# Altium PCB Waspmoteprint_Diff_zu_I2C.PcbDoc
Units mm, origin at the board's own origin, x right, y up, seen from the top; angles counter-clockwise.
Board outline 41.91 x 35.56 mm, 2 copper layers (Top Layer, Bottom Layer), stack 1.586 mm thick; 26 components, 27 nets, 110 pads, 21 vias.
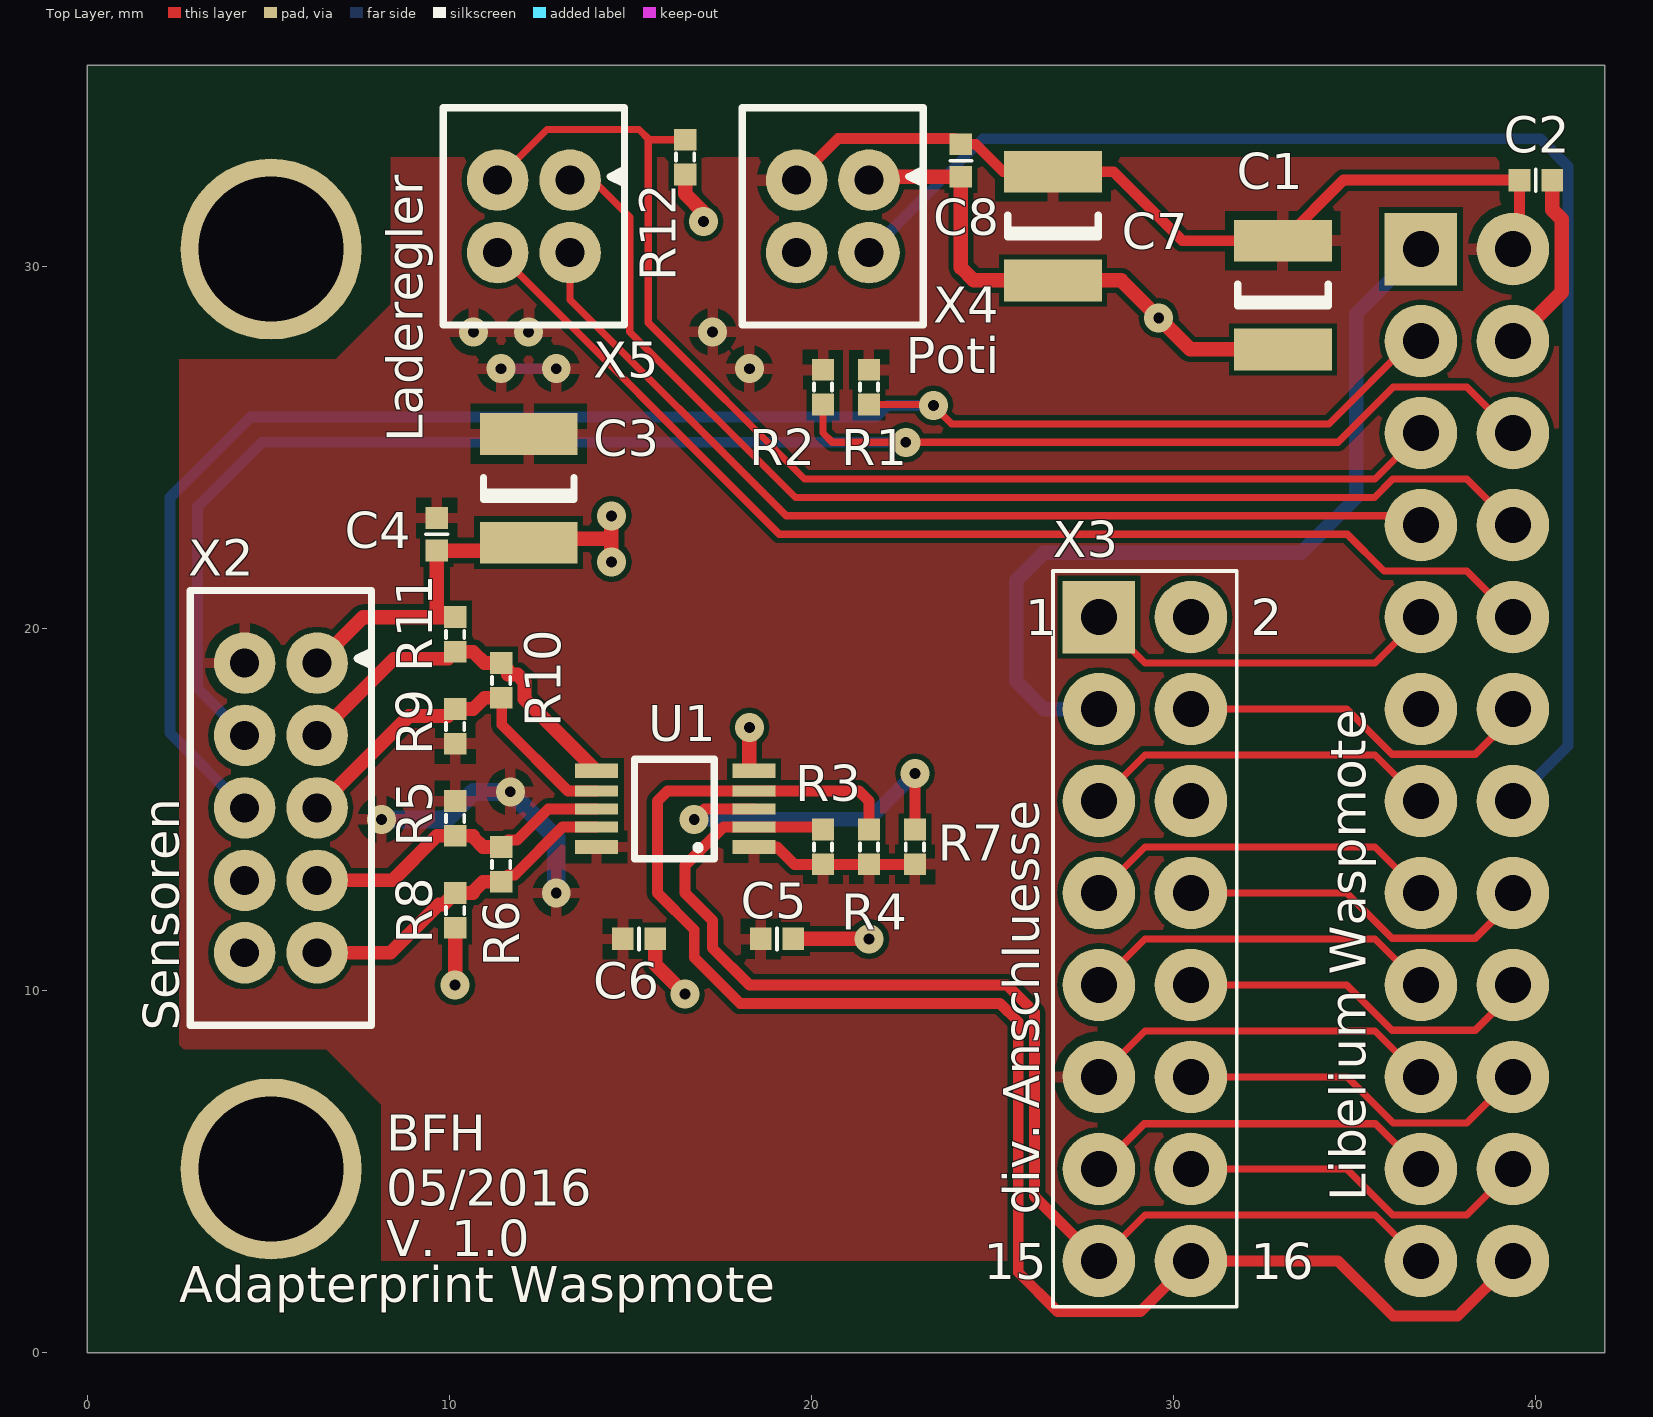
[diagram p0: Top Layer view]
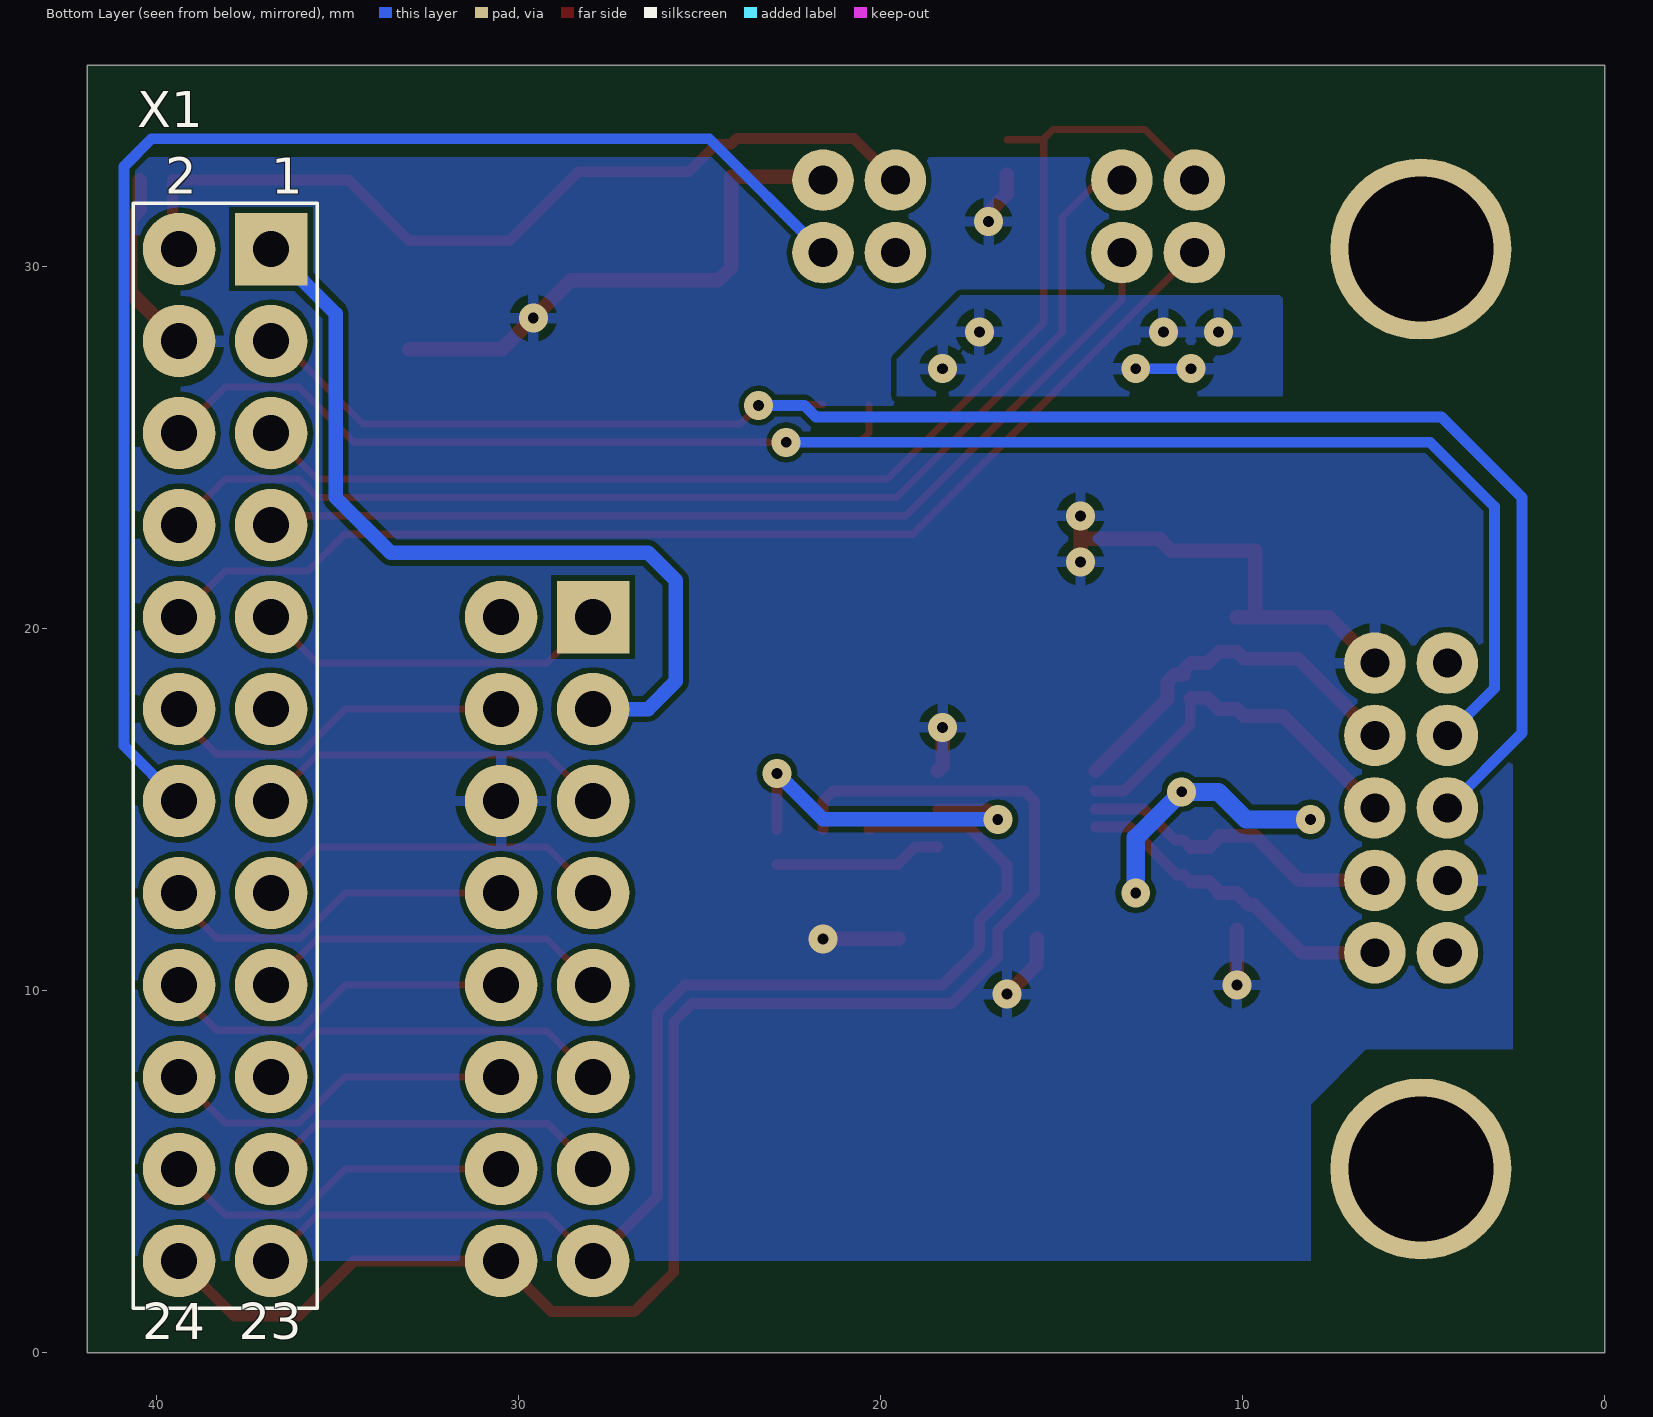
[diagram p1: Bottom Layer view, seen from below]

## Layer stack, top to bottom
Top Solder: solder mask 0.0102, Solder Resist, Dk 3.5
Top Layer: signal copper 0.018
Dielectric1: core 1.55, FR-4, Dk 4.8
Bottom Layer: signal copper 0.018
Bottom Solder: solder mask 0.0102, Solder Resist, Dk 3.5

## Board outline
0,0 0,35.56 41.91,35.56 41.91,0

## Design rules (kind name [scope] priority, off if disabled: settings)
Clearance Clearance-xPP-xTP-xTT [All] p1: gap=0.15
ComponentClearance [All] p1: gap=0.25 collisioncheckmode=3 verticalgap=0.25 showdistances=FALSE
DiffPairsRouting [All] p1: maxlimit=0.25 minlimit=0.25 mostfreqgap=0.25 toplayer_minwidth=0.381 toplayer_maxwidth=0.381 toplayer_prefwidth=0.381 bottomlayer_minwidth=0.381 bottomlayer_maxwidth=0.381 bottomlayer_prefwidth=0.381 maxuncoupledlength=12.5
Height [All] p1: minheight=0 maxheight=25 prefheight=12.5
HoleSize HoleSize-PTH [All] p1: absolutevalues=TRUE maxlimit=5 minlimit=0.25 maxpercent=80.000 minpercent=20.000
HoleToHoleClearance [All] p1: gap=0.15 allowstackedmicrovias=TRUE
MinimumAnnularRing "Minimum IAR  >0.45mm" [((ObjectKind = 'Pad') OR (ObjectKind = 'Via')) And (Layer = 'MultiLayer') And (HoleDiameter > AsMM(0.45))] p1: minimumring=0.25 // minimum inner annular ring for pads > 0.45mm finished hole size
MinimumAnnularRing "Minimum IAR <=0.45mm" [((ObjectKind = 'Pad') OR (ObjectKind = 'Via')) And (Layer = 'MultiLayer') And (HoleDiameter <= AsMM(0.45))] p2: minimumring=0.225 // minimum inner annular ring for pads <= 0.45mm finished hole size
MinimumSolderMaskSliver [All] p1: minsoldermaskwidth=0.1
PlaneClearance PlaneClearance-IPI [All] p1: clearance=0.4
PlaneConnect [All] p1: planeconnectstyle=Relief reliefexpansion=0.4 reliefentries=4 reliefconductorwidth=0.3 reliefairgap=0.2
PolygonConnect PolygonConnect-xTW [All] p1: connectstyle=Relief reliefconductorwidth=0.3 reliefentries=4 polygonreliefangle="90 Angle" airgapwidth=0.254
RoomDefinition Waspmoteprint_Diff_zu_I2C [InComponentClass('Waspmoteprint_Diff_zu_I2C')] p1: confinementstyle=ConfineIn formatcopy=TRUE lockcomponents=FALSE outline -5.08,-0.79 94.92,-0.79 94.92,98.73 -5.08,98.73
RoutingCorners [All] p1: cornerstyle=45-Degree minsetback=2.5 maxsetback=2.5
RoutingVias "RoutingVias > 0.45mm" [(ObjectKind = 'Via') And (HoleDiameter > AsMM(0.45))] p1: holewidth=0.5 width=1 viastyle="Through Hole" minholewidth=0.45 minwidth=0.95 maxholewidth=0.9 maxwidth=1.4 // finishet hole size > 0.45mm
RoutingVias "RoutingVias <= 0.45mm" [(ObjectKind = 'Via') And (HoleDiameter <= AsMM(0.45))] p2: holewidth=0.3 width=0.8 viastyle="Through Hole" minholewidth=0.25 minwidth=0.7 maxholewidth=0.5 maxwidth=1 // finishet hole size <= 0.45mm
SilkToSilkClearance [All] p1: silktosilkclearance=0.2
SilkToSolderMaskClearance SilkscreenOverComponentPads [IsPad] p1: minsilkscreentomaskgap=0.2 clearancetoexposedcopper=TRUE
SolderMaskExpansion [All] p1: expansion=0.1
UnpouredPolygon [All] p1: allowunpoured=FALSE
Width Width-xTW [All] p1: maxlimit=1.5 minlimit=0.15 preferedwidth=0.3
18 further rules are at their usual default settings.

## Classes and differential pairs
differential pair DSCL: +DSCL_P -DSCL_N
differential pair DSDA: +DSDA_P -DSDA_N

## Components (designator, comment, footprint, x,y, rotation, side; value= is the part's Value field where it differs from the comment)
C1 "100uF" CAPC3225[1210]X120 33.02,29.21 r90 top
C2 "100nF" CAPC1005[0402]X50 40.005,32.385 r180 top
C3 "100uF" CAPC3225[1210]X120 12.192,23.876 r90 top
C4 "100nF" CAPC1005[0402]X50 9.652,22.606 r90 top
C5 "100nF" CAPC1005[0402]X50 19.05,11.43 r180 top
C6 "100nF" CAPC1005[0402]X50 15.24,11.43 r180 top
C7 "100uF" CAPC3225[1210]X120 26.67,31.115 r90 top
C8 "100nF" CAPC1005[0402]X50 24.13,32.925 r90 top
R1 "100k" RESC1005[0402]X35 21.59,26.67 r90 top
R2 "100k" RESC1005[0402]X35 20.32,26.67 r90 top
R3 "4k7" RESC1005[0402]X35 20.32,13.97 r270 top
R4 "4k7" RESC1005[0402]X35 21.59,13.97 r270 top
R5 "390" RESC1005[0402]X35 10.16,14.76 r90 top
R6 "120" RESC1005[0402]X35 11.43,13.49 r90 top
R7 "100k" RESC1005[0402]X35 22.86,13.97 r90 top
R8 "390" RESC1005[0402]X35 10.16,12.22 r90 top
R9 "390" RESC1005[0402]X35 10.16,17.3 r270 top
R10 "120" RESC1005[0402]X35 11.43,18.57 r270 top
R11 "390" RESC1005[0402]X35 10.16,19.84 r270 top
R12 "100k" RESC1005[0402]X35 16.51,33.02 r90 top
U1 "PCA9615" TSSOP10 18.415,13.97 r90 top
X1 "HEADER_12X2" HDR2X12_V_M 36.83,30.48 r180 bottom
X2 "Header_10Pol" Header_2mm_10Pol 6.35,19.05 r270 top
X3 "HEADER_8X2" HDR2X8_V_M 27.94,20.32 r0 top
X4 "Header_4Pol" Header_2mm_4Pol 21.59,32.385 r270 top
X5 "Header_4Pol" Header_2mm_4Pol 13.335,32.385 r270 top

## Footprints (in the part's own frame and the unit in brackets; to place one, negate y for a bottom-side part, rotate by r counter-clockwise, add the part's x,y. Pads: shape width x height; smd on the part's side, far side on the other; paste and mask are expansions set on the pad)
CAPC1005[0402]X50 [mm] "Chip Capacitor; 1.0x0.5mm"
  rect 0.6x0.62 smd: 1(-0.45,0) 2(0.45,0)
  silkscreen extent 0,-0.3 0,0.3, body extent -0.5,-0.25 0.5,0.25, height 0.5
CAPC3225[1210]X120 [mm] "Chip Capacitor; 3.2x2.5 mm"
  rect 1.15x2.7 smd: 1(-1.5,0) 2(1.5,0)
  silkscreen extent -0.3,-1.25 0.3,1.25, body extent -1.6,-1.25 1.6,1.25, height 1.2
HDR2X8_V_M [mm] "Connector; Header; 8x2 Position male"
  rect 2x2 hole 1: 1(0,0)
  round 2 hole 1: 2(2.54,0) 3(0,-2.54) 4(2.54,-2.54) 5(0,-5.08) 6(2.54,-5.08) 7(0,-7.62) 8(2.54,-7.62) 9(0,-10.16) 10(2.54,-10.16) 11(0,-12.7) 12(2.54,-12.7) 13(0,-15.24) 14(2.54,-15.24) 15(0,-17.78) 16(2.54,-17.78)
  silkscreen extent -1.27,-19.05 3.81,1.27, body extent -1.28,-19.07 3.82,1.27, height 8.3
HDR2X12_V_M [mm] "Connector; Header; 6x2 Position male"
  rect 2x2 hole 1: 1(0,0)
  round 2 hole 1: 2(-2.54,0) 3(0,-2.54) 4(-2.54,-2.54) 5(0,-5.08) 6(-2.54,-5.08) 7(0,-7.62) 8(-2.54,-7.62) 9(0,-10.16) 10(-2.54,-10.16) 11(0,-12.7) 12(-2.54,-12.7) 13(0,-15.24) 14(-2.54,-15.24) 15(0,-17.78) 16(-2.54,-17.78) 17(0,-20.32) 18(-2.54,-20.32) 19(0,-22.86) 20(-2.54,-22.86) 21(0,-25.4) 22(-2.54,-25.4) 23(0,-27.94) 24(-2.54,-27.94)
  silkscreen extent -3.81,-29.25 1.27,1.27, body extent -3.82,-29.24 1.28,1.27, height 8.3
Header_2mm_4Pol [mm]
  round 1.7 hole 0.8: 1(0,0) 2(0,-2) 3(2,0) 4(2,-2)
  silkscreen extent -2,-3.5 4,1.5
Header_2mm_10Pol [mm]
  round 1.7 hole 0.8: 1(0,0) 2(0,-2) 3(2,0) 4(2,-2) 5(4,0) 6(4,-2) 7(6,0) 8(6,-2) 9(8,0) 10(8,-2)
  silkscreen extent -2,-3.5 10,1.5
RESC1005[0402]X35 [mm] "Chip Resistor; 1x0.5mm"
  rect 0.6x0.62 smd: 1(-0.48,0) 2(0.48,0)
  silkscreen extent -0.1,-0.25 0.1,0.25, body extent -0.5,-0.25 0.5,0.25, height 0.35
TSSOP10 [mm]
  rect 0.4x1.2 smd: 1(0,0) 5(2.1,0) 6(2.1,4.35) 10(0,4.35)
  rect 0.3x1.2 smd: 2(0.55,0) 3(1.05,0) 4(1.55,0) 7(1.55,4.35) 8(1.05,4.35) 9(0.55,4.35)
  silkscreen extent -0.33,1.1 2.42,3.3

## Part data
C1 C2 C3 C4 C5 C6 C7 C8: library part C, "Capacitor"
R1 R2 R3 R4 R5 R6 R7 R8 R9 R10 R11 R12: library part R, "Resistor"
U1: "differential I2C-bus buffer"
X1: "Header, 12-Pin, Dual row"
X2: library part Header_Hirose_10, "Header Hirose 10 Pol"
X3: "Header, 16-Pin, Dual row"
X4 X5: library part Header_Hirose_4, "Header Hirose 4 Pol"

## Free pads (board coordinates)
  round 5 hole 4: 0(5.08,5.08) 0(5.08,30.48)

## Via types
v1: diameter 0.8, hole 0.3, Top Layer to Bottom Layer, 21 vias

## Nets (pads, with @x,y where several pads share a name; then routed paths per layer and width w, separated by ;. In a path a pad name is that pad's centre, name@x,y a point inside that pad or via, vN(x,y) a via of type N, cw(c..) or ccw(c..) an arc to the next point about the centre after c; other vN are vias at no path point)
3V3: C1.2 C2.2 C3.2 C4.2 C5.2 C6.2 C7.2 C8.2 R1.2 R2.2 R3.2 R4.2 R5.2 R7.1 R9.2 U1.1 U1.10 X1.2 X1.19 X2.2 X3.11 X4.2 | length 48
  Top Layer w0.2: X3.11 29.21,8.89 35.56,8.89 X1.19
  Top Layer w0.3: U1.1 19.05,13.97 19.53,13.49 R3.2 R4.2 R7.1 ; X4.2 20.74,33.535 23.97,33.535 C8.2 24.537,33.375 25.297,32.615 C7.2 28.345,32.615 30.25,30.71 C1.2 34.695,32.385 C2.2 39.555,30.665 X1.2
  Bottom Layer w0.3: v1@10.668,27.94 v1(10.668,28.194) ; v1(11.43,27.178) v1(12.954,27.178) v1@12.827,27.305
  Bottom Layer w0.5: v1(8.128,14.732) 9.906,14.732 10.668,15.494 v1(11.684,15.494) 12.954,14.224 v1(12.954,12.7)
  other v1: 18.288,27.178 12.192,28.194 17.272,28.194
5V: X1.22 X3.14 | length 9.9
  Top Layer w0.2: X3.14 34.785,5.08 36.055,3.81 38.1,3.81 X1.22
ANALOG: X1.1 X3.3 | length 23.3
  Bottom Layer w0.4: X3.3 26.416,17.78 25.654,18.542 25.654,21.336 26.416,22.098 33.528,22.098 35.052,23.622 35.052,28.702 X1.1
ANALOG1: X1.20 X3.12 | length 9.9
  Top Layer w0.2: X3.12 34.798,7.62 36.068,6.35 38.1,6.35 X1.20
ANALOG2: X1.17 X3.9 | length 9.9
  Top Layer w0.2: X3.9 29.21,11.43 35.56,11.43 X1.17
ANALOG3: X1.18 X3.10 | length 10.1
  Top Layer w0.2: X3.10 34.785,10.16 36.035,8.91 38.334,8.91 39.37,9.946 X1.18
ANALOG4: X1.15 X3.7 | length 9.9
  Top Layer w0.2: X3.7 29.21,13.97 35.56,13.97 X1.15
ANALOG5: X1.16 X3.8 | length 10.1
  Top Layer w0.2: X3.8 34.785,12.7 36.035,11.45 38.334,11.45 39.37,12.486 X1.16
ANALOG6: X1.13 X3.5 | length 9.9
  Top Layer w0.2: X3.5 29.21,16.51 35.56,16.51 X1.13
ANALOG7: X1.14 X4.3 | length 39.1
  Bottom Layer w0.3: X4.3 24.733,33.528 40.132,33.528 40.894,32.766 40.894,16.764 X1.14
DIGITAL1: X1.12 X3.4 | length 10.1
  Top Layer w0.2: X3.4 34.785,17.78 36.035,16.53 38.334,16.53 39.37,17.566 X1.12
DIGITAL2: X1.9 X3.1 | length 9.9
  Top Layer w0.2: X3.1 29.21,19.05 35.56,19.05 X1.9
DIGITAL3: X1.10 X5.4 | length 32.2
  Top Layer w0.2: X5.4 19.114,22.606 34.798,22.606 35.814,21.59 38.1,21.59 X1.10
DIGITAL4: X1.7 X5.3 | length 27.4
  Top Layer w0.2: X5.3 13.335,29.083 19.304,23.114 36.576,23.114 X1.7
DIGITAL5: X1.8 X5.1 | length 32.3
  Top Layer w0.2: X5.1 13.969,32.385 14.986,31.368 14.986,28.194 19.558,23.622 35.547,23.622 36.055,24.13 38.1,24.13 X1.8
DIGITAL6: R12.2 X1.5 X5.2 | length 34.6
  Top Layer w0.2: X5.2@11.319,32.401 12.7,33.782 15.24,33.782 15.522,33.5 R12.2 ; 15.494,33.528 15.494,28.448 19.812,24.13 35.56,24.13 X1.5
DSCL_N: R10.1 R11.2 U1.6 X2.3 | length 10.4
  Top Layer w0.381: X2.3 8.47,19.17 9.97,19.17 R11.2 10.66,19.36 10.971,19.05 R10.1 11.62,18.86 11.62,18.731 11.881,18.731 12.08,18.531 12.08,18.055 U1.6
DSCL_P: R9.1 R10.2 U1.7 X2.5 | length 10.5
  Top Layer w0.3: R10.2@11.449,18.071 11.449,17.345 13.275,15.52 U1.7
  Top Layer w0.381: X2.5 8.889,17.59 9.97,17.59 R9.1 10.66,17.78 10.971,18.09 R10.2 R10.2@11.449,18.071
DSDA_N: R6.1 R8.2 U1.9 X2.9 | length 9.2
  Top Layer w0.3: R6.1 11.62,13.201 11.807,13.201 13.126,14.52 U1.9
  Top Layer w0.381: X2.9 8.378,11.05 9.709,12.381 9.841,12.381 R8.2 10.66,12.7 10.66,12.741 10.93,13.01 R6.1
DSDA_P: R5.1 R6.2 U1.8 X2.7 | length 8.8
  Top Layer w0.3: R6.2 11.62,14.16 11.874,14.16 12.734,15.02 U1.8
  Top Layer w0.381: X2.7 8.429,13.05 9.66,14.28 R5.1 10.66,14.28 10.66,14.239 10.93,13.97 R6.2
GND: C1.1 C2.1 C3.1 C4.1 C5.1 C6.1 C7.1 C8.1 R8.1 R11.1 R12.1 U1.5 X1.4 X2.1 X2.8 X3.6 X4.1 | length 40.7
  Top Layer w0.4: X2.1 7.62,20.32 9.652,20.32 ; v1(10.16,10.16) R8.1@10.16,11.684 ; R11.1 9.652,20.32 ; v1(14.478,21.844) 14.478,22.479 ; v1(14.478,23.114) 14.478,22.479 ; C6.1 15.69,10.726 v1(16.51,9.906) ; R12.1 16.51,32.004 17.018,31.496 v1(17.018,31.242) ; v1(18.288,17.272) 18.288,16.197 U1.5 ; C5.1 v1(21.59,11.43) ; X4.1 21.68,32.475 C8.1 24.13,29.972 24.487,29.615 C7.1 28.551,29.615 30.456,27.71 C1.1 ; X1.4 40.72,29.29 40.72,31.304 40.455,31.569 C2.1 ; 9.652,20.32 C4.1 11.972,22.156 C3.1 12.295,22.479 14.478,22.479
  other v1: 29.591,28.575
GSP_POWER: X1.21 X3.13 | length 9.9
  Top Layer w0.2: X3.13 29.19,6.33 35.58,6.33 X1.21
INT1: R2.1 X1.6 X2.4 | length 48.3
  Top Layer w0.2: R2.1 20.32,25.4 20.574,25.146 v1(22.606,25.146) 34.544,25.146 36.068,26.67 38.1,26.67 X1.6
  Bottom Layer w0.3: X2.4 3.048,18.352 3.048,23.368 4.826,25.146 v1(22.606,25.146)
INT2: R1.1 X1.3 X2.6 | length 48
  Top Layer w0.2: R1.1 23.34,26.19 v1(23.368,26.162) 23.876,25.654 34.29,25.654 X1.3@36.576,27.94
  Top Layer w0.3: X1.3@36.576,27.94 X1.3
  Bottom Layer w0.3: X2.6 2.286,17.114 2.286,23.622 4.51,25.846 21.782,25.846 22.098,26.162 v1(23.368,26.162)
NetR7_2: R7.2 U1.3 | length 9.9
  Top Layer w0.3: v1(16.764,14.732) 17.052,15.02 U1.3 ; R7.2 v1(22.86,16.002)
  Bottom Layer w0.4: v1(16.764,14.732) 21.59,14.732 v1(22.86,16.002)
SCL: R4.1 U1.4 X1.24 X3.16 | length 44.2
  Top Layer w0.3: R4.1 21.59,15.24 21.31,15.52 U1.4 16.028,15.52 15.748,15.24 15.748,12.7 16.764,11.684 16.764,10.922 18.034,9.652 25.204,9.652 25.712,9.144 25.712,2.228 26.797,1.143 29.083,1.143 X3.16 34.544,2.54 36.068,1.016 37.846,1.016 X1.24
SDA: R3.1 U1.2 X1.23 X3.15 | length 34
  Top Layer w0.2: X3.15 29.21,3.81 35.56,3.81 X1.23
  Top Layer w0.3: R3.1 20.25,14.52 U1.2 17.568,14.52 16.51,13.462 16.51,12.7 17.272,11.938 17.272,11.176 18.288,10.16 25.4,10.16 26.162,9.398 26.162,4.318 X3.15
pads on no net: X1.11 X2.10 X3.2 X4.4

## Polygon pours and split planes (outlines as drawn)
3V3 on Top Layer "Top Layer-3V3" (solid, remove dead copper, pour order 2): 2.54,2.54 40.64,2.54 40.64,33.02 2.54,33.02
3V3 on Bottom Layer "Bottom Layer - 3V3" (solid, pour order 4): 19.558,27.432 19.558,26.416 8.89,26.416 8.89,29.21 17.78,29.21
GND on Bottom Layer "Bottom Layer - GND" (solid, remove dead copper, pour order 5): 2.54,2.54 2.54,33.02 40.64,33.02 40.64,2.54

## Other copper
Top Layer:
  pour cut-out: 2.54,33.02 2.54,27.432 6.858,27.432 8.382,28.956 8.382,33.02
  pour cut-out: 2.54,2.54 8.128,2.54 8.128,6.858 6.604,8.382 2.54,8.382
Bottom Layer:
  pour cut-out: 2.54,2.54 8.128,2.54 8.128,6.858 6.604,8.382 2.54,8.382
  pour cut-out: 2.54,33.02 2.54,27.432 6.858,27.432 8.382,28.956 8.382,33.02

## Silkscreen, mask and mechanical layers (free items; w line width, h text height)
Top Overlay:
  text "Poti" at 22.606,27.051 h1
  text "Laderegler" at 9.271,25.146 h1 r90
  text "Sensoren" at 2.54,8.89 h1 r90
  text "BFH" at 8.255,5.588 h1
  text "Libelium Waspmote" at 35.306,4.191 h1 r90
  text "05/2016" at 8.255,4.064 h1
  text "div. Anschluesse" at 26.289,3.81 h1 r90
  text "V. 1.0" at 8.255,2.667 h1
  text "Adapterprint Waspmote" at 2.54,1.397 h1
Mechanical 1:
  the board outline again, w0.2
  text ".Pcb_File_Name_No_Path" at 5.842,-0.889 h1

## Text inside footprints (layer, text, board x,y; h text height)
X1: Bottom Overlay "24" at 40.386,0.381 h1; Bottom Overlay "23" at 37.719,0.381 h1; Bottom Overlay "1" at 36.83,32.004 h1; Bottom Overlay "2" at 39.751,32.004 h1
X3: Top Overlay "16" at 32.131,2.032 h1; Top Overlay "15" at 24.765,2.032 h1; Top Overlay "1" at 25.908,19.812 h1; Top Overlay "2" at 32.131,19.812 h1